# Altium PCB Christmas Keychain.PcbDoc
Units mm, origin at the board's own origin, x right, y up, seen from the top; angles counter-clockwise.
Board outline 54 x 50 mm, 2 copper layers (Top Layer, Bottom Layer); 22 components, 13 nets, 49 pads, 6 vias.
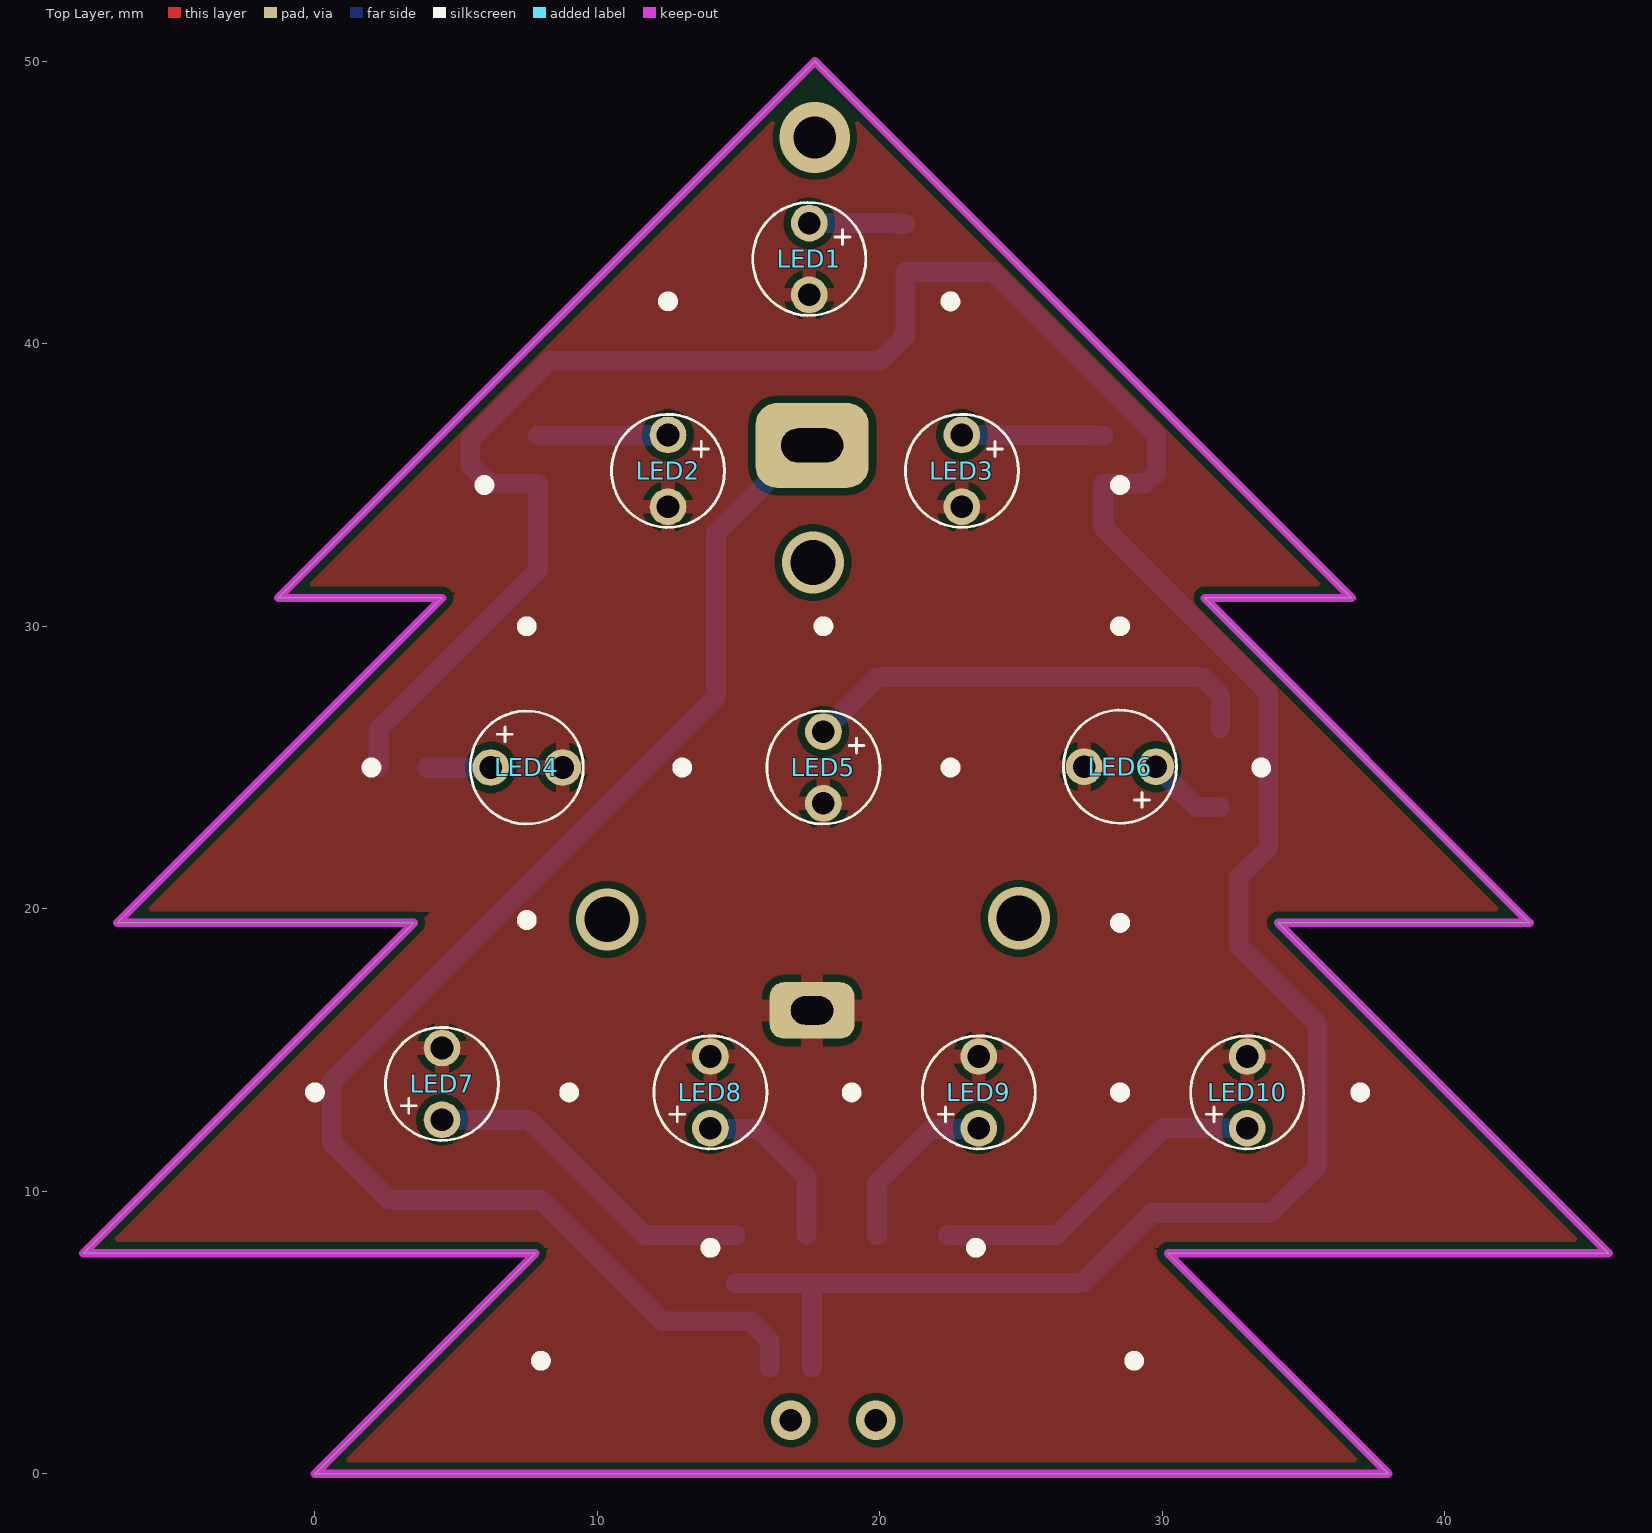
[diagram p0: Top Layer view]
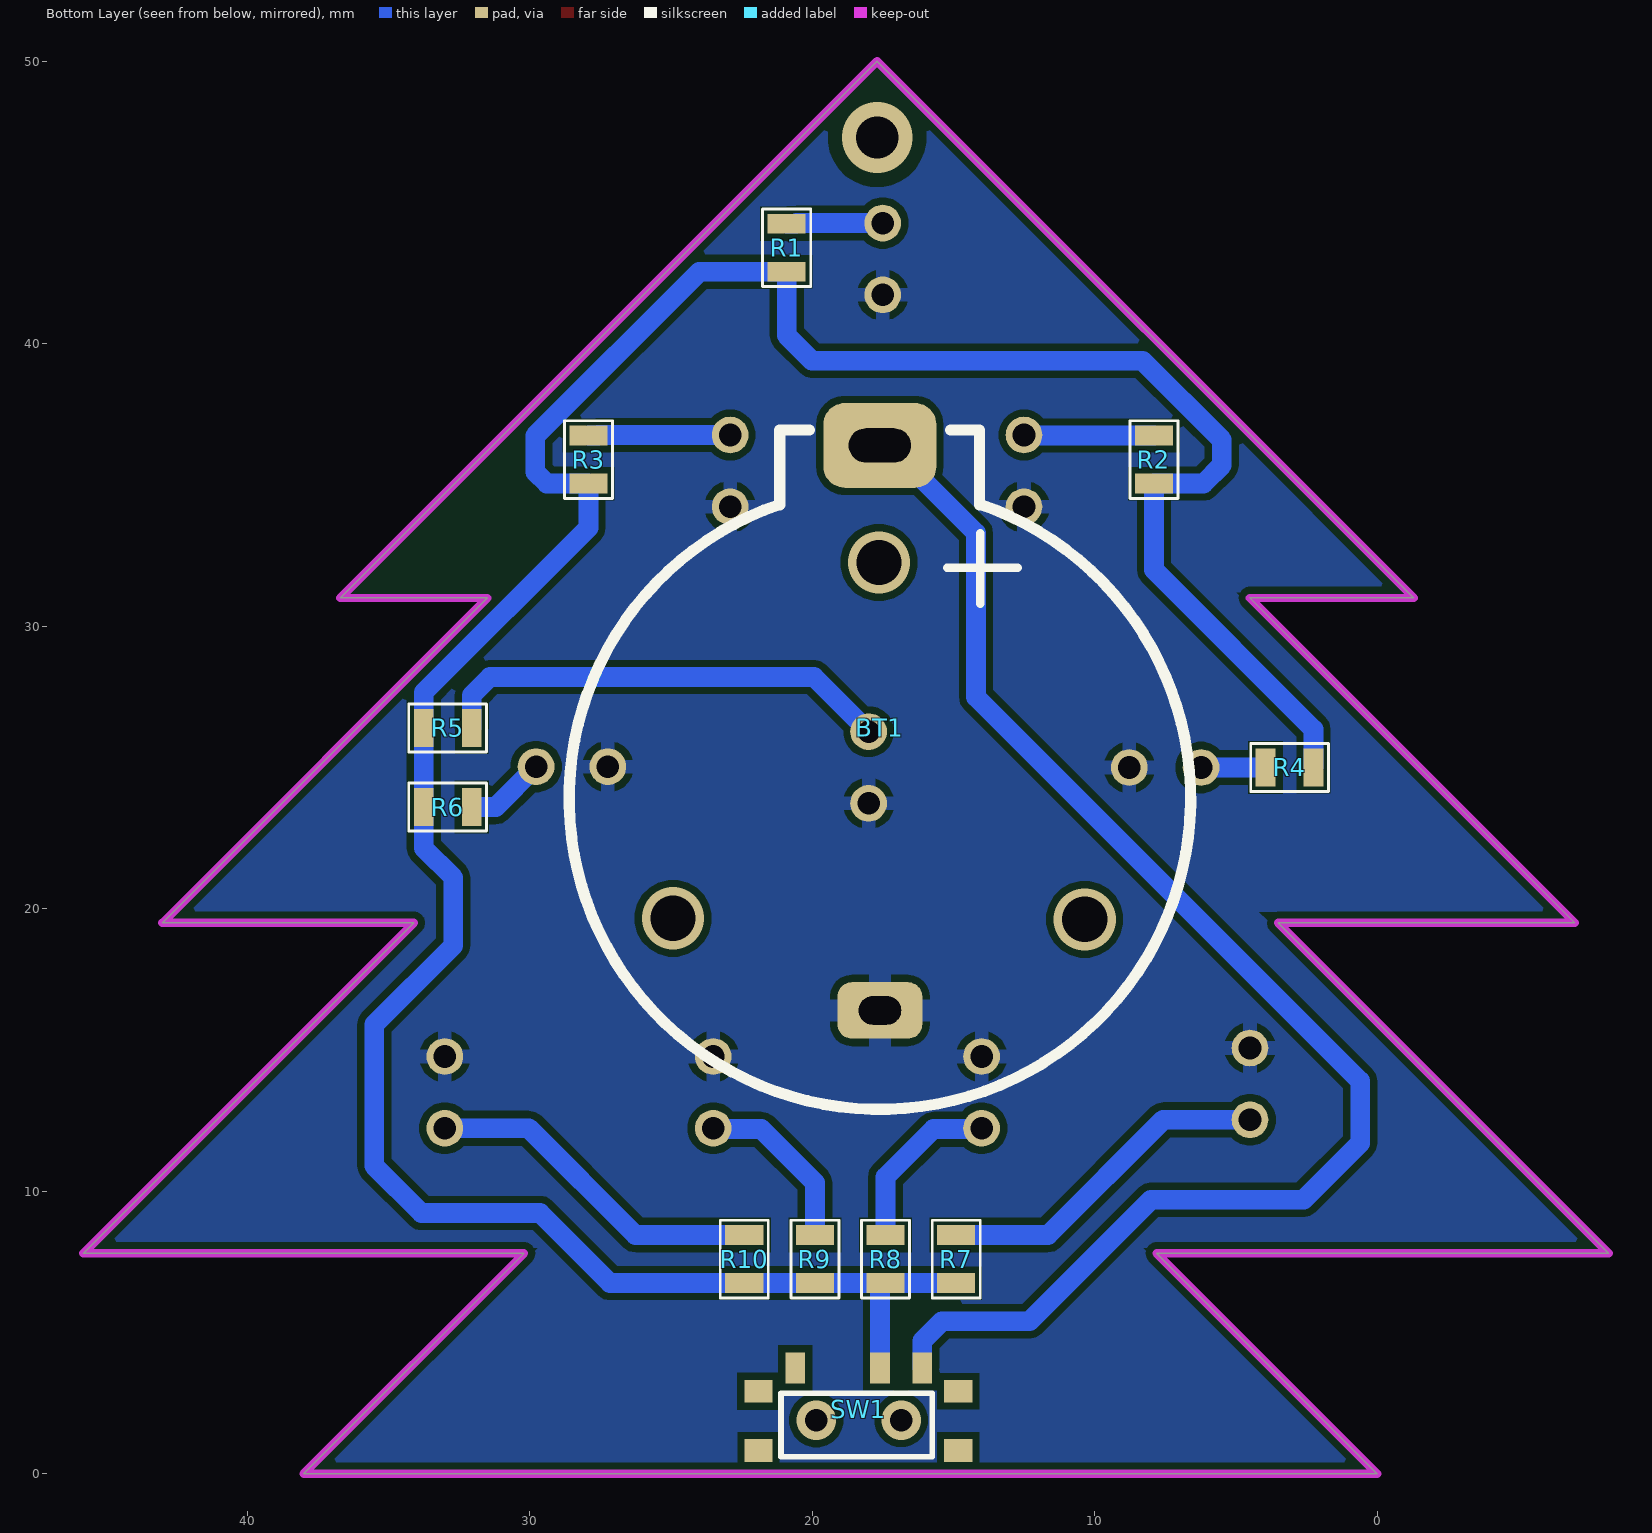
[diagram p1: Bottom Layer view, seen from below]
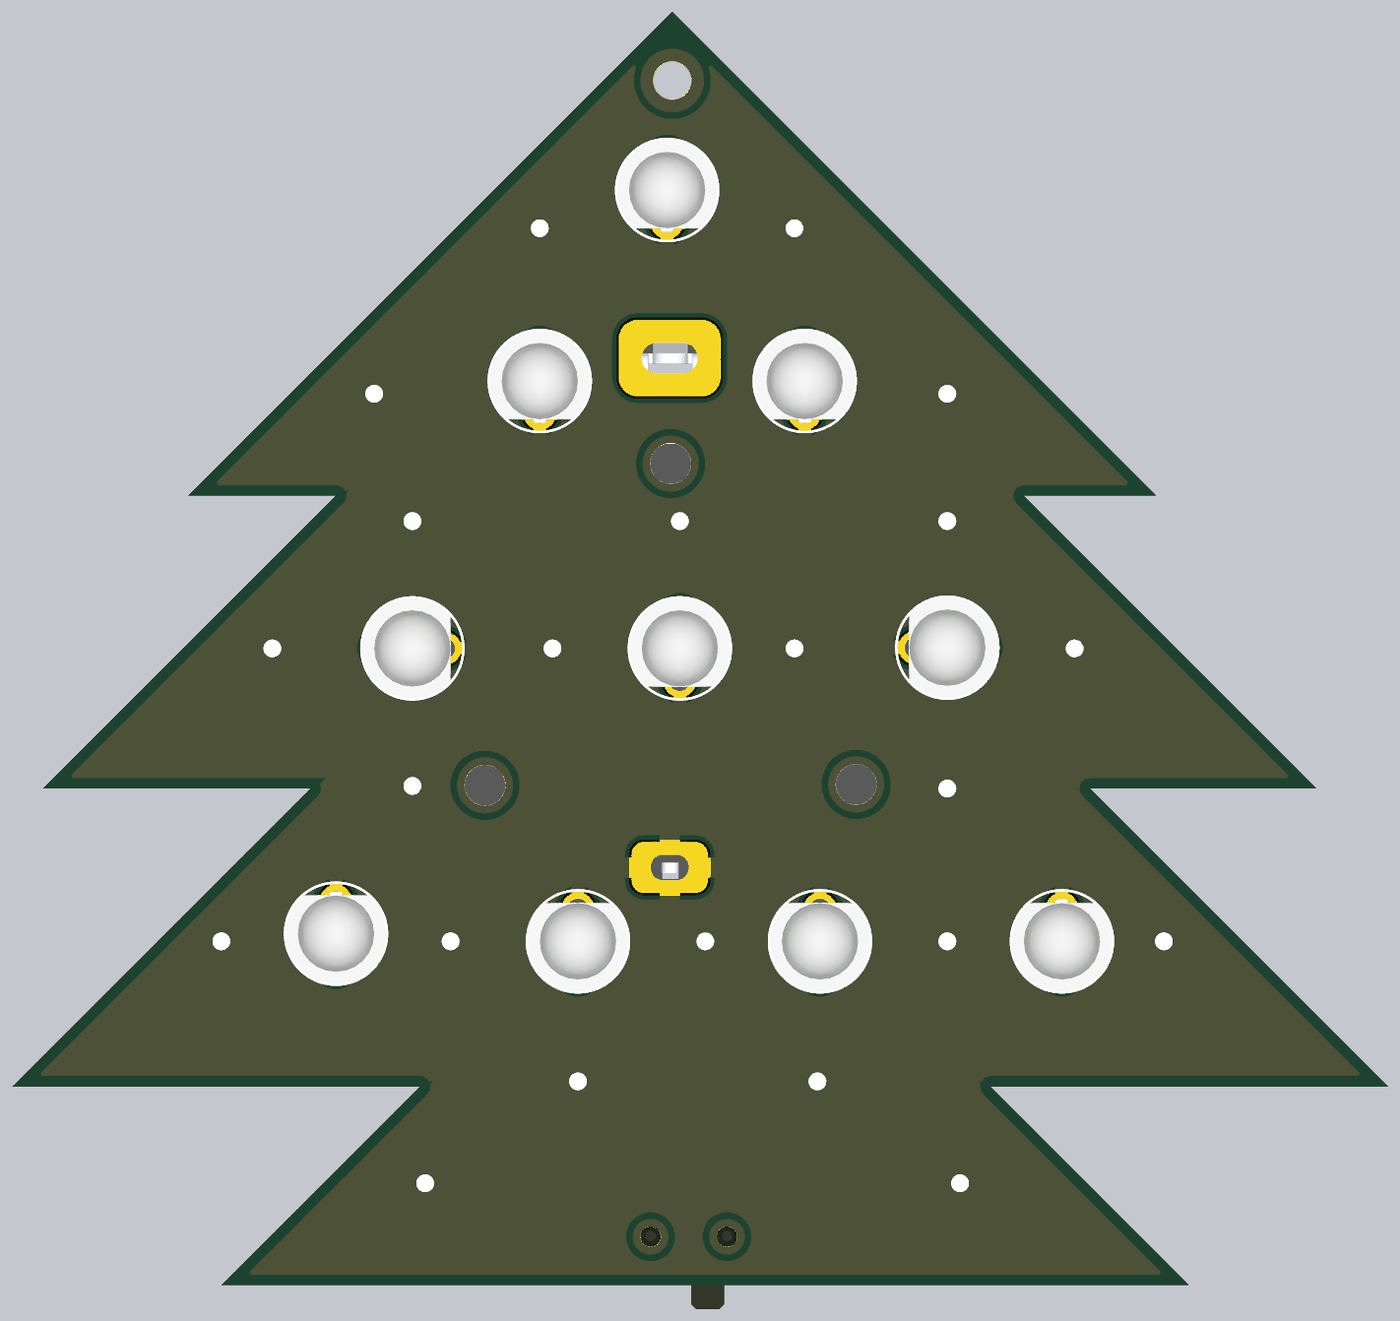
[diagram p2: 3D render of the assembled board from above, using the file's embedded part models]
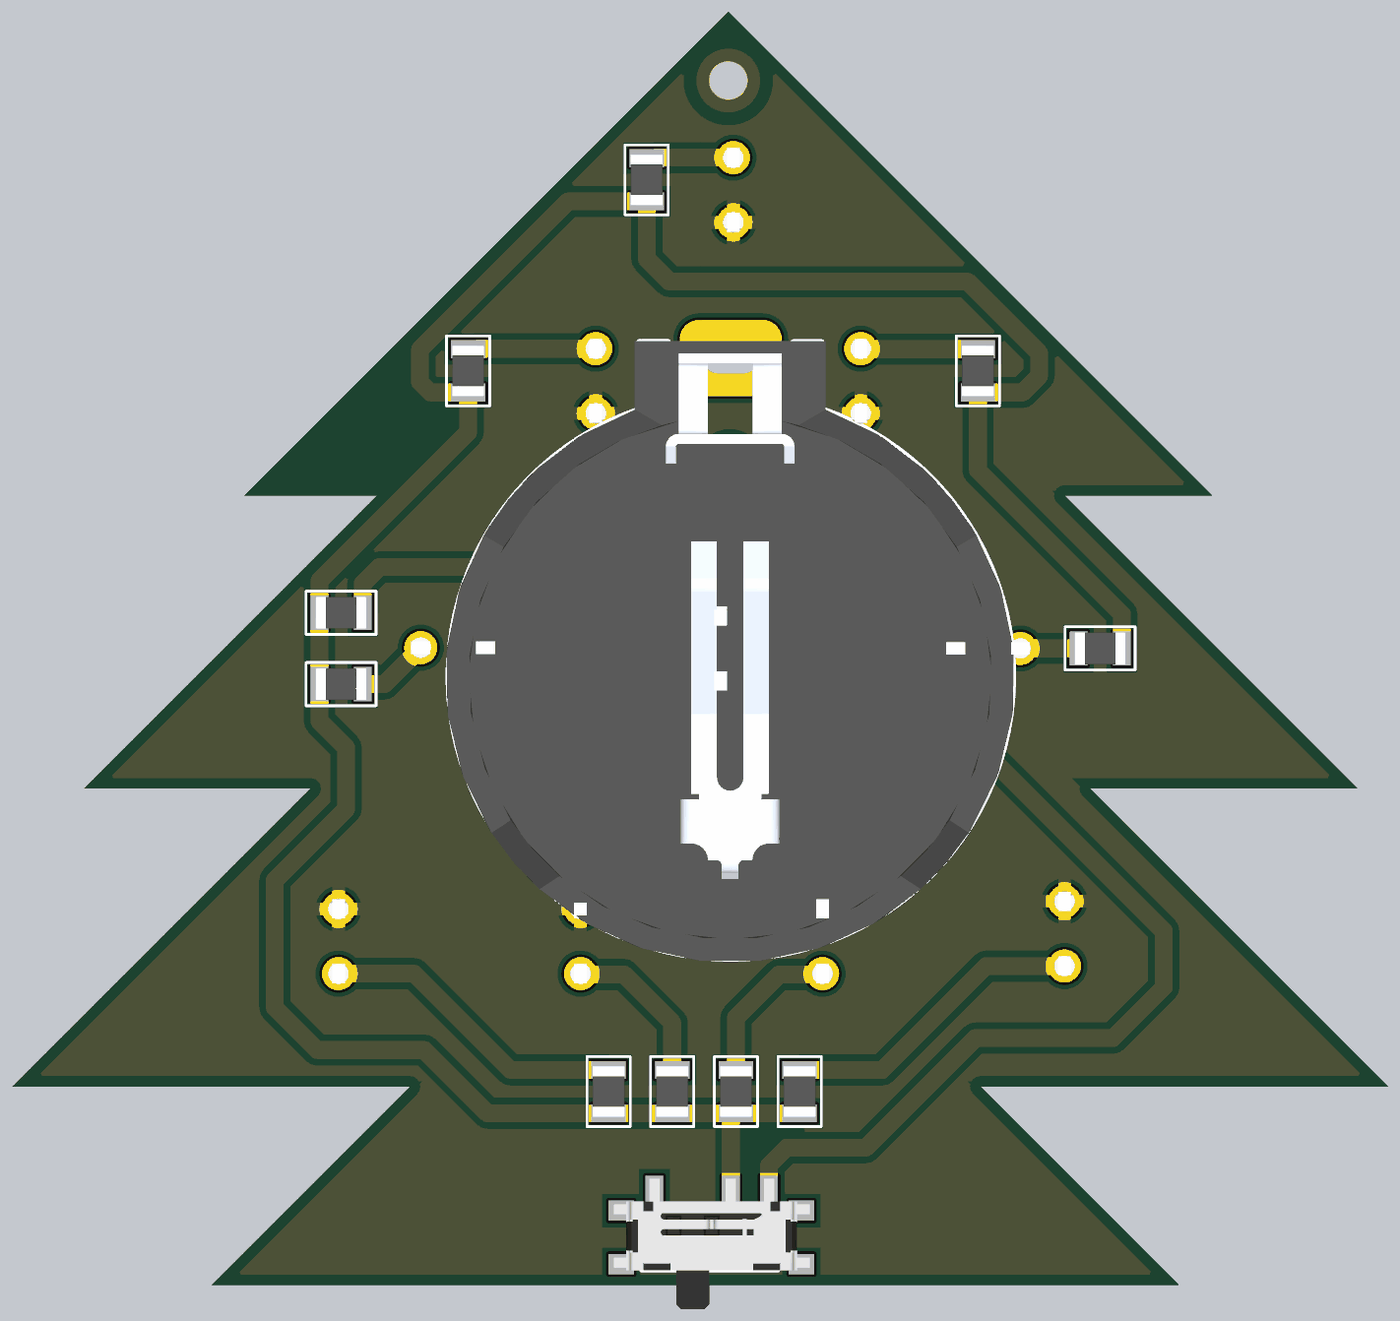
[diagram p3: 3D render of the assembled board from below, using the file's embedded part models]

## Layer stack, top to bottom
Top Solder: solder mask 0.0102, Solder Resist, Dk 3.5
Top Layer: signal copper 0.0356
Dielectric 1: dielectric 0.32, FR-4, Dk 4.8
Bottom Layer: signal copper 0.0356
Bottom Solder: solder mask 0.0102, Solder Resist, Dk 3.5

## Board outline
-8.2,7.8 3.5,19.5 -7,19.5 4.5,31 -1.3,31 17.7,50 36.7,31 31.5,31 43,19.5 34.1,19.5 45.8,7.8 30.2,7.8 38,0 0,0 7.8,7.8

## Design rules (kind name [scope] priority, off if disabled: settings)
Clearance [All] p1: gap=0.254 ignorepadtopadclearanceinfootprint=FALSE except(0: Arc-Hole Track-Hole SMDPad-Hole THPad-Hole Via-Hole Fill-Hole Poly-Hole Region-Hole Text-Hole)
PolygonConnect [All] p1: connectstyle=Relief reliefconductorwidth=0.254 reliefentries=4 polygonreliefangle="90 Angle" airgapwidth=0.254
RoutingVias [All] p1: holewidth=0.711 width=1.27 viastyle="Through Hole" minholewidth=0.711 minwidth=1.27 maxholewidth=0.711 maxwidth=1.27
SolderMaskExpansion [All] p1: expansion=0.102 istentingtop=FALSE
Width [All] p1: maxlimit=10 minlimit=0.254 preferedwidth=1 minimp=50.000000 maximp=50.000000 favimp=50.000000
30 further rules are at their usual default settings.

## Components (designator, comment, footprint, x,y, rotation, side; value= is the part's Value field where it differs from the comment)
BT1 "BS-7" "BATTERY HOLDER" 17.6,23.9 r270 bottom
LED1 "151031SS06000" "RED LED" 17.5,43 r270 top
LED2 "151031SS06000" "RED LED" 12.5,35.5 r270 top
LED3 "151031SS06000" "RED LED" 22.9,35.5 r270 top
LED4 "151031SS06000" "RED LED" 7.5,25 r0 top
LED5 "151031SS06000" "RED LED" 18,25 r270 top
LED6 "151031SS06000" "RED LED" 28.5,25.03 r180 top
LED7 "151031SS06000" "RED LED" 4.5,13.8 r90 top
LED8 "151031SS06000" "RED LED" 14,13.5 r90 top
LED9 "151031SS06000" "RED LED" 23.5,13.5 r90 top
LED10 "151031SS06000" "RED LED" 33,13.5 r90 top
R1 "CRCW080550R0FKTA" "RES 0805" 20.9,43.4 r90 bottom value=50R
R2 "CRCW080550R0FKTA" "RES 0805" 7.9,35.9 r90 bottom value=50R
R3 "CRCW080550R0FKTA" "RES 0805" 27.912,35.9 r90 bottom value=50R
R4 "CRCW080550R0FKTA" "RES 0805" 3.1,25 r0 bottom value=50R
R5 "CRCW080550R0FKTA" "RES 0805" 32.9,26.4 r180 bottom value=50R
R6 "CRCW080550R0FKTA" "RES 0805" 32.9,23.6 r180 bottom value=50R
R7 "CRCW080550R0FKTA" "RES 0805" 14.9,7.6 r90 bottom value=50R
R8 "CRCW080550R0FKTA" "RES 0805" 17.4,7.6 r90 bottom value=50R
R9 "CRCW080550R0FKTA" "RES 0805" 19.9,7.6 r90 bottom value=50R
R10 "CRCW080550R0FKTA" "RES 0805" 22.4,7.6 r90 bottom value=50R
SW1 "450404015514" "SLIDE SWITCH" 18.1,1.8 r180 bottom

## Footprints (in the part's own frame and the unit in brackets; to place one, negate y for a bottom-side part, rotate by r counter-clockwise, add the part's x,y. Pads: shape width x height; smd on the part's side, far side on the other; paste and mask are expansions set on the pad)
"BATTERY HOLDER" [mm]
  rrect50% 3x4 hole 1.2 slot 2.2 at 90 deg: 1(-12.5,0)
  rrect50% 2x3 hole 1 slot 1.5 at 90 deg mask+0.102: 2(7.5,0)
  silkscreen extent -13.05,-11 11,11, body extent -13.18,-11.2 11.22,11.15, height 8.5
"RED LED" [mm]
  round 1.3 hole 0.8 mask+0.102: 1(-1.27,0) 2(1.27,0)
  silkscreen extent -2,-2 2,2, body extent -1.97,-1.96 1.65,1.96, height 5.3
"RES 0805" [mm]
  rect 0.7x1.35 smd mask+0.102: 1(-0.85,0) 2(0.85,0)
  silkscreen extent -1.38,-0.85 1.38,0.85, body extent -1,-0.63 1,0.63, height 0.6
"SLIDE SWITCH" [mm]
  rect 0.7x1.1 smd mask+0.102: 1(2,1.95) 2(0.5,1.95) 3(-2.5,1.95)
  rect 1x0.8 smd mask+0.102: ""(-3.8,-0.975) ""(-3.8,1.125) ""(3.275,-0.975) ""(3.275,1.125)
  silkscreen extent -3,-1.2 2.35,1.05, body extent -4.1,-2.75 3.6,2.38, height 1.4

## Part data
BT1: library part "BATTERY HOLDER TH", "BATTERY HOLDER 20MM TH", Case Code (Metric)=1608, Case Code (Imperial)=0603, Color=Blue, Forward Current=30mA, Forward Voltage=3.2V, Lens Color=Colorless, Manufacturer="Wurth Electronics", Manufacturer Part Number=150060BS75000, Max Operating Temperature=85°C, Max Reverse Voltage (DC)=5V, Min Operating Temperature=-40°C, Package Quantity=1, Power Dissipation=105mW, Supplier Part Number=732-4966-1-ND, Test Current=20mA, Case/Package=0603, Category=LEDs, ComponentLink1Description=https://datasheet.ciiva.com/29563/150060bs75000-29563034.pdf?src-supplier=Digikey, ComponentLink1URL=https://datasheet.ciiva.com/29563/150060bs75000-29563034.pdf?src-supplier=Digikey, ComponentLink2Description=https://datasheet.ciiva.com/29279/759426-da-01-en-chipled-0603-w-kl-blau-150060bs75000-29279193.pdf?src-supplier=Conrad, ComponentLink2URL=https://datasheet.ciiva.com/29279/759426-da-01-en-chipled-0603-w-kl-blau-150060bs75000-29279193.pdf?src-supplier=Conrad, ComponentLink3Description=https://datasheet.ciiva.com/22656/1911343-22656939.pdf?src-supplier=Element14, ComponentLink3URL=https://datasheet.ciiva.com/22656/1911343-22656939.pdf?src-supplier=Element14, ComponentLink4Description=https://datasheet.ciiva.com/48430/150060bs75000-eng-tds-48430039.pdf?src-supplier=Distrelec, ComponentLink4URL=https://datasheet.ciiva.com/48430/150060bs75000-eng-tds-48430039.pdf?src-supplier=Distrelec, ComponentLink5Description=https://datasheet.ciiva.com/29563/150060bs75000-29563035.pdf?src-supplier=Digikey, ComponentLink5URL=https://datasheet.ciiva.com/29563/150060bs75000-29563035.pdf?src-supplier=Digikey, ComponentLink6Description=https://datasheet.ciiva.com/29563/150060bs75000-29563036.pdf?src-supplier=Digikey, ComponentLink6URL=https://datasheet.ciiva.com/29563/150060bs75000-29563036.pdf?src-supplier=Digikey, Dominant Wavelength=470nm, Height=0.8mm, Length=1.6mm, Lens Size=0.7mm, Lens Style=Clear,Flat,Rectangular, Lens Transparency=Clear, Luminous Intensity=145mcd, Mounting Technology="Surface Mount", Packaging="Cut Tape", Pricing="1=0,16, 50=0,155, 100=0,133, 500=0,115 (USD)", Reach SVHC Compliant=Unknown, Reverse Voltage=5V, RoHS=Yes, RoHS Compliant=Yes, Series=WL-SMCW, Stock=35055, Supplier=Digikey, Viewing Angle=140°, Wavelength=470nm, Width=0.8mm
LED1 LED2 LED3 LED4 LED5 LED6 LED7 LED8 LED9 LED10: library part "RED LED TH", "LED RED 3MM ROUND TH", Case/Package=Radial, Color=Red, Forward Current=30mA, Forward Voltage=2.2V, Manufacturer="Wurth Electronics", Max Operating Temperature=85°C, Min Operating Temperature=-40°C, Supplier Part Number=732-5006-ND, Test Current=20mA, Category=LEDs, ComponentLink1Description=https://datasheet.ciiva.com/22657/151031ss06000-22657010.pdf?src-supplier=Element14, ComponentLink1URL=https://datasheet.ciiva.com/22657/151031ss06000-22657010.pdf?src-supplier=Element14, ComponentLink2Description=https://datasheet.ciiva.com/29335/759483-da-01-en-tht-led-3mm-superrot-151031ss06000-29335440.pdf?src-supplier=Conrad, ComponentLink2URL=https://datasheet.ciiva.com/29335/759483-da-01-en-tht-led-3mm-superrot-151031ss06000-29335440.pdf?src-supplier=Conrad, ComponentLink3Description=https://datasheet.ciiva.com/29562/151031ss06000-29562907.pdf?src-supplier=Digikey, ComponentLink3URL=https://datasheet.ciiva.com/29562/151031ss06000-29562907.pdf?src-supplier=Digikey, Dominant Wavelength=640nm, Height=5.55mm, Lens Color=Red, Lens Size=3mm, Lens Style=Round,Domed,Circular, Lens Transparency=Diffused, Luminous Intensity=35mcd, Manufacturer Part Number=151031SS06000, Mounting Technology="Through Hole", Pricing="1=0,18, 50=0,172, 100=0,147, 500=0,127 (USD)", Reach SVHC Compliant=Unknown, RoHS=Yes, RoHS Compliant=Yes, Series=WL-TMRC, Stock=1598, Supplier=Digikey, Viewing Angle=60°, Wavelength=630nm
R1 R2 R3 R4 R5 R6 R7 R8 R9 R10: library part "RES 50 OHM 0805 SMD", "RES 50 OHM 1% 1/8W 0805", Case Code (Metric)=2012, Case Code (Imperial)=0805, Manufacturer="KOA Speer", Manufacturer Part Number=RK73B2ATTD101J, Max Operating Temperature=155°C, Min Operating Temperature=-55°C, Package Quantity=5000, Power Rating=125mW, Resistance Tolerance=5%, Resistor Type="Thick Film", Supplier Part Number=2019-RK73B2ATTD101JDKR-ND, Temperature Coefficient=200ppm/°C, Voltage Rating=150V, Case/Package=0805, Category="Chip SMD Resistors", ComponentLink1Description=https://datasheet.ciiva.com/5557/rk73b-5557130.pdf?src-supplier=Mouser, ComponentLink1URL=https://datasheet.ciiva.com/5557/rk73b-5557130.pdf?src-supplier=Mouser, Construction=Rectangular, Depth=1.25mm, Height=0.5mm, Lead Free="Lead Free", Length=2mm, Military Standard=Not, Packaging="Tape and Reel", Pricing="1=0,1, 10=0,023, 50=0,0146, 100=0,0121, 500=0,0083, 1000=0,00717 (USD)", Reach SVHC Compliant=Unknown, RoHS=Yes, RoHS Compliant=Yes, Series=RK73B, Stock=513996, Supplier=Digikey, Technology="THICK FILM", Termination=SMD/SMT, Tolerance=5%, Voltage Rating (DC)=150V, Width=1.25mm
SW1: library part "SLIDE SWITCH SMD", "SLIDE SWITCH SMD 0.3A 5V", Current Rating=300mA, Manufacturer="Wurth Electronics", Supplier Part Number=732-13665-1-ND, Voltage Rating=5V, Insulation Resistance=100MR, Category=Uncategorized, ComponentLink1Description=https://katalog.we-online.de/em/datasheet/450404015514.pdf?src-supplier=Digikey, ComponentLink1URL=https://katalog.we-online.de/em/datasheet/450404015514.pdf?src-supplier=Digikey, Manufacturer Part Number=450404015514, Packaging=10Packaging, Pricing="1=0,79, 25=0,768, 50=0,733, 250=0,663, 1500=0,582 (USD)", RoHS=No, Stock=9705, Supplier=Digikey

## Via types
v1: diameter 2.2, hole 1.6, Top Layer to Bottom Layer, tented both sides, 3 vias
v2: diameter 1.4, hole 0.8, Top Layer to Bottom Layer, tented both sides, 2 vias
v3: diameter 2.5, hole 1.5, Top Layer to Bottom Layer, 1 vias

## Nets (pads, with @x,y where several pads share a name; then routed paths per layer and width w, separated by ;. In a path a pad name is that pad's centre, name@x,y a point inside that pad or via, vN(x,y) a via of type N, cw(c..) or ccw(c..) an arc to the next point about the centre after c; other vN are vias at no path point)
GND: BT1.2 LED1.2 LED2.2 LED3.2 LED4.2 LED5.2 LED6.2 LED7.2 LED8.2 LED9.2 LED10.2
NetBT1_1: BT1.1 SW1.1 | length 51.3
  Bottom Layer w0.7: SW1.1 16.1,4.7 15.4,5.4 12.3,5.4 8,9.7 2.6,9.7 0.6,11.7 0.6,13.9 14.2,27.5 14.2,33.3 17.3,36.4 BT1.1
NetLED1_1: LED1.1 R1.2 | length 3.4
  Bottom Layer w0.7: LED1.1 20.555,44.27 20.575,44.25 R1.2
NetLED2_1: LED2.1 R2.2 | length 4.6
  Bottom Layer w0.7: R2.2 12.48,36.75 LED2.1
NetLED3_1: LED3.1 R3.2 | length 5
  Bottom Layer w0.7: LED3.1 27.567,36.77 27.587,36.75 R3.2
NetLED4_1: LED4.1 R4.2 | length 2.3
  Bottom Layer w0.7: R4.2 LED4.1
NetLED5_1: LED5.1 R5.2 | length 16.3
  Bottom Layer w0.7: LED5.1 19.93,28.2 31.4,28.2 32.05,27.55 R5.2
NetLED6_1: LED6.1 R6.2 | length 2.9
  Bottom Layer w0.7: LED6.1 31.2,23.6 R6.2
NetLED7_1: LED7.1 R7.2 | length 12.1
  Bottom Layer w0.7: LED7.1 7.57,12.53 11.65,8.45 R7.2
NetLED8_1: LED8.1 R8.2 | length 6.2
  Bottom Layer w0.7: LED8.1 14.03,12.2 15.7,12.2 17.4,10.5 R8.2
NetLED9_1: LED9.1 R9.2 | length 6.2
  Bottom Layer w0.7: R9.2 19.9,10.3 21.8,12.2 23.47,12.2 LED9.1
NetLED10_1: LED10.1 R10.2 | length 12.2
  Bottom Layer w0.7: R10.2 26.25,8.45 30.03,12.23 LED10.1
Power: R1.1 R2.1 R3.1 R4.1 R5.1 R6.1 R7.1 R8.1 R9.1 R10.1 SW1.2 | length 103.3
  Bottom Layer w0.7: R4.1 2.25,26.35 7.9,32 R2.1 6.15,35.05 5.5,35.7 5.5,36.6 8.3,39.4 20,39.4 20.9,40.3 R1.1 23.991,42.55 29.8,36.741 29.8,35.46 29.39,35.05 R3.1 27.912,33.488 33.75,27.65 R5.1 R6.1 33.75,22.15 32.7,21.1 32.7,18.7 35.5,15.9 35.5,10.9 33.83,9.23 29.63,9.23 27.15,6.75 R10.1 R9.1 R8.1@17.6,6.75 ; R7.1 R8.1 R8.1@17.6,6.75 ; SW1.2 R8.1@17.6,6.75
pads on no net: SW1. SW1.3
copper on no net:
  other v1: 10.35,19.625 24.921,19.661 17.637,32.258
  other v2: 16.85,1.9 19.85,1.9
  other v3: 17.7,47.3

## Polygon pours and split planes (outlines as drawn)
GND on Top Layer "GND_L01_P000" (solid, remove dead copper, pour order 0): 17.7,49.8 36.3,31.2 31.1,31.2 42.6,19.7 33.7,19.7 45.4,8 29.7,8 37.5,0.2 0.5,0.2 8.3,8 -7.8,8 4.1,19.9 -6.3,19.9 5,31.2 -0.9,31.2
GND on Bottom Layer "GND_L02_P001" (solid, remove dead copper, pour order 1): 17.7,49.8 36.3,31.2 31.1,31.2 42.6,19.7 33.7,19.7 45.4,8 29.7,8 37.5,0.2 0.5,0.2 8.3,8 -7.7,8 4.2,19.9 -6.3,19.9 5,31.2 -0.9,31.2

## Keep-outs
Keep-Out Layer:
  the board outline again, w0.3

## Silkscreen, mask and mechanical layers (free items; w line width, h text height)
Top Overlay:
  circle w0.5: c14,8 r0.1
  circle w0.5: c28.5,30 r0.1
  circle w0.5: c22.5,25 r0.1
  circle w0.5: c29,4 r0.1
  circle w0.5: c28.5,19.5 r0.1
  circle w0.5: c37,13.5 r0.1
  circle w0.5: c0,13.5 r0.1
  circle w0.5: c8,4 r0.1
  circle w0.5: c28.5,13.5 r0.1
  circle w0.5: c23.4,8 r0.1
  circle w0.5: c9,13.5 r0.1
  circle w0.5: c7.5,19.6 r0.1
  circle w0.5: c18,30 r0.1
  circle w0.5: c13,25 r0.1
  circle w0.5: c2,25 r0.1
  circle w0.5: c7.5,30 r0.1
  circle w0.5: c28.5,35 r0.1
  circle w0.5: c6,35 r0.1
  circle w0.5: c12.5,41.5 r0.1
  lines w0.5: 19.08,13.56 ccw(c19,13.5) 19.1,13.5 ; 22.571,41.571 ccw(c22.5,41.5) 22.6,41.5 ; 33.555,25.083 ccw(c33.5,25) 33.6,25